# Altium PCB arduino_motor.PcbDoc
Units mm, origin at the board's own origin, x right, y up, seen from the top; angles counter-clockwise.
Board outline 71.63 x 51.69 mm, 2 copper layers (Top Layer, Bottom Layer); 24 components, 23 nets, 95 pads, 7 vias.
Unrouted connection lines stored in the file: 8.
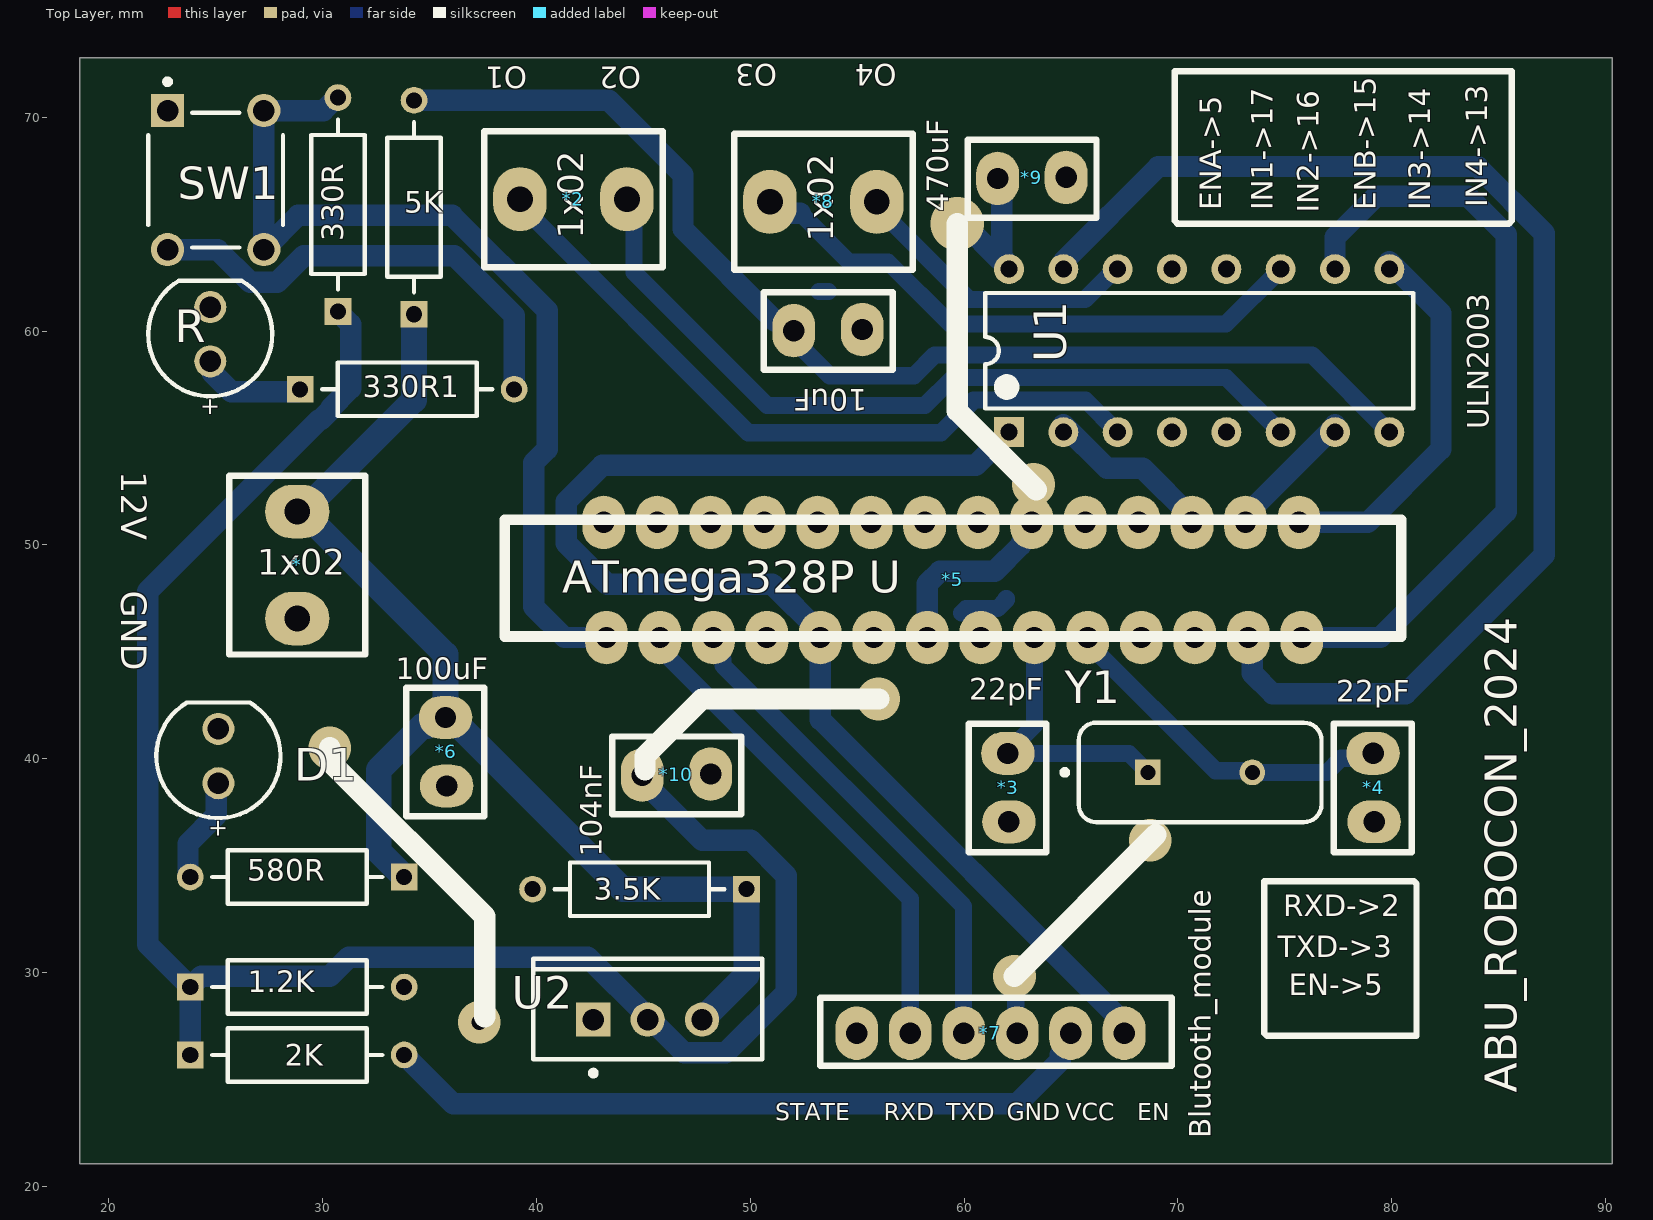
[diagram p0: Top Layer view]
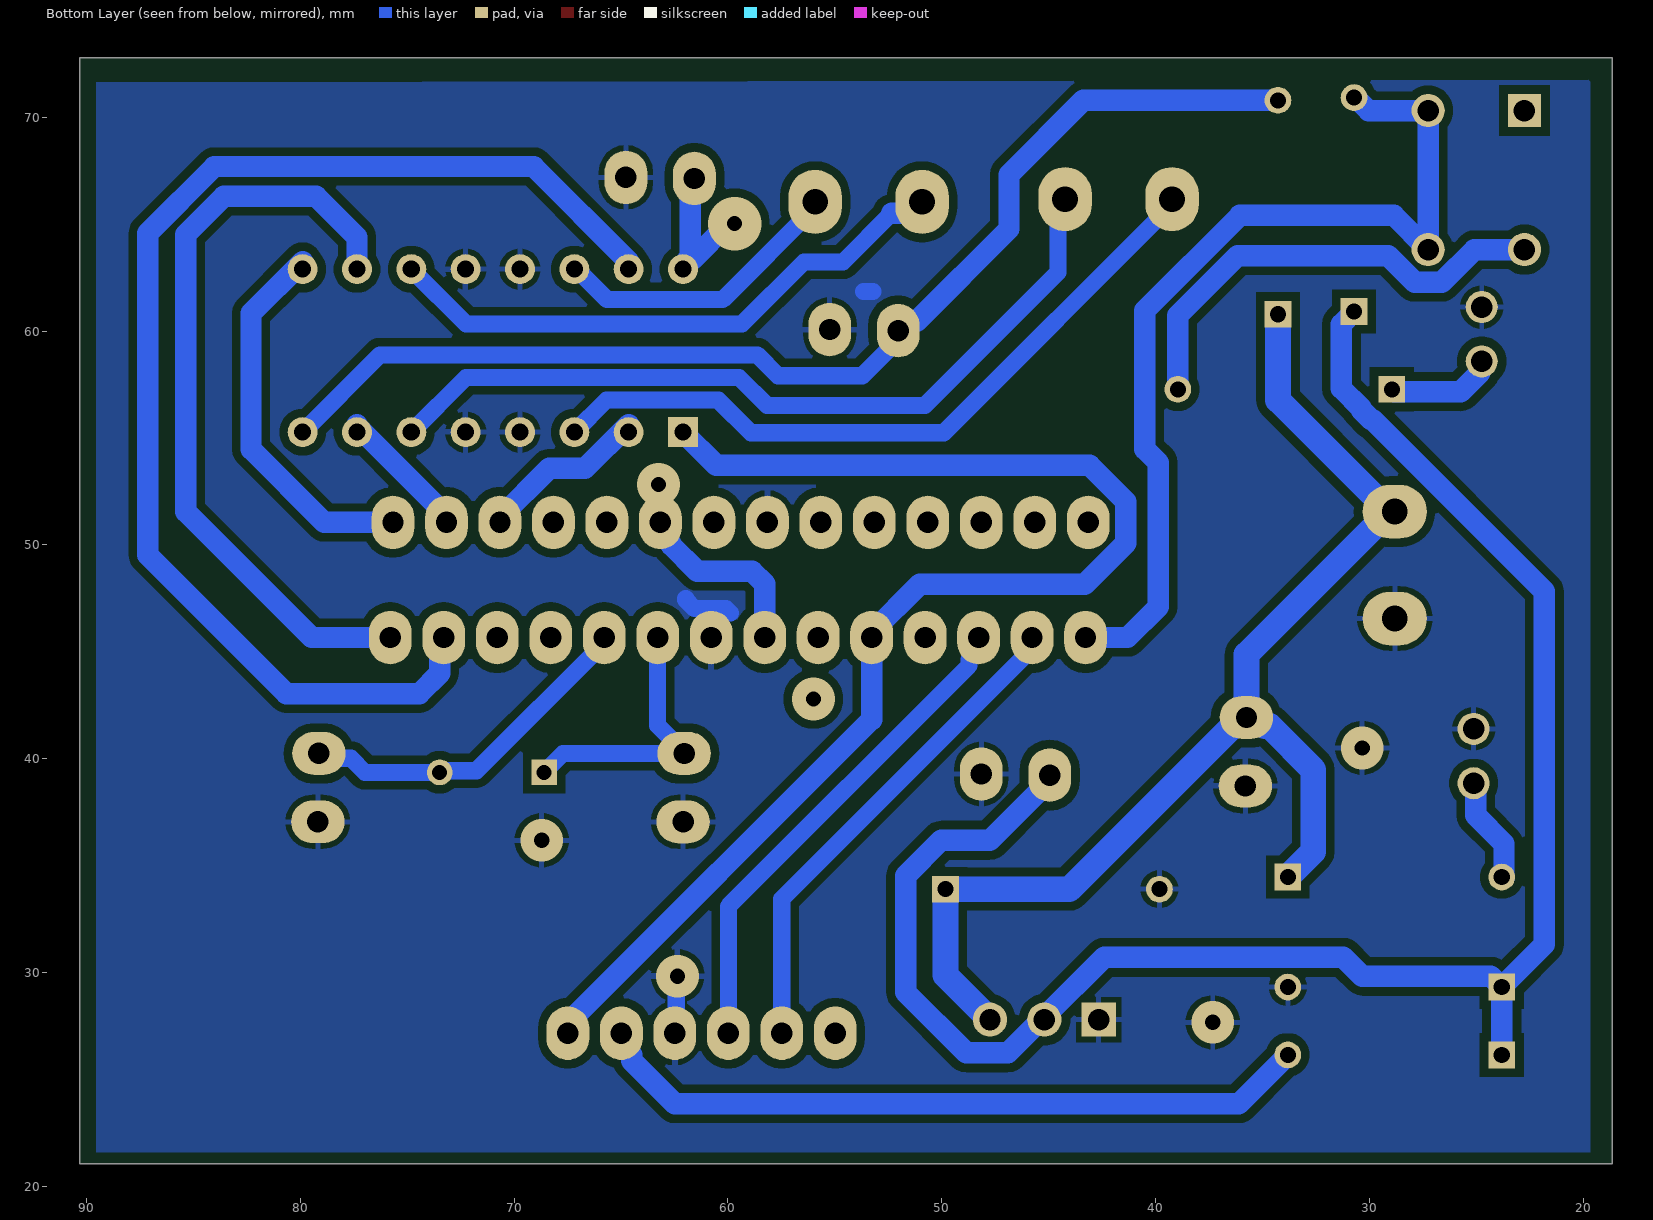
[diagram p1: Bottom Layer view, seen from below]

## Layer stack, top to bottom
Top Solder: solder mask 0.0102, Solder Resist, Dk 3.5
Top Layer: signal copper 0.0356
Dielectric 1: dielectric 0.32, FR-4, Dk 4.8
Bottom Layer: signal copper 0.0356
Bottom Solder: solder mask 0.0102, Solder Resist, Dk 3.5

## Board outline
18.669,21.082 18.669,72.771 90.297,72.771 90.297,21.082

## Design rules (kind name [scope] priority, off if disabled: settings)
Clearance Clearance_4 [All] p1: gap=0.4 ignorepadtopadclearanceinfootprint=FALSE
Clearance Clearance_3 [All] p2: gap=0.4 ignorepadtopadclearanceinfootprint=FALSE
Clearance Clearance_2 [All] p3: gap=0.4 ignorepadtopadclearanceinfootprint=FALSE
Clearance Clearance_1 [All] p4: gap=0.4 ignorepadtopadclearanceinfootprint=FALSE
Clearance [All] p5: gap=0.4 ignorepadtopadclearanceinfootprint=FALSE
PolygonConnect [All] p1: connectstyle=Relief reliefconductorwidth=0.254 reliefentries=4 polygonreliefangle="90 Angle" airgapwidth=0.254
RoutingVias [All] p1: holewidth=0.711 width=1.27 viastyle="Through Hole" minholewidth=0.711 minwidth=1.27 maxholewidth=0.711 maxwidth=1.27
SolderMaskExpansion [All] p1: expansion=0.102 istentingtop=FALSE
Width Width_4 [All] p1: maxlimit=1.2 minlimit=0.254 preferedwidth=0.8
Width Width_3 [All] p2: maxlimit=1.2 minlimit=0.254 preferedwidth=0.8 toplayer_maxwidth=0.254 toplayer_prefwidth=0.254 minimp=50.000000 maximp=50.000000 favimp=50.000000
Width Width_2 [All] p3: maxlimit=1.2 minlimit=0.254 preferedwidth=0.254 toplayer_maxwidth=0.254 minimp=50.000000 maximp=50.000000 favimp=50.000000
Width [All] p4: maxlimit=0.254 minlimit=0.254 preferedwidth=0.254
Width Width_1 [(InNet('GND') AND OnLayer('Bottom 3D Body'))] p5: maxlimit=1.2 minlimit=0.254 preferedwidth=0.254 toplayer_maxwidth=0.254 minimp=50.000000 maximp=50.000000 favimp=50.000000
30 further rules are at their usual default settings.

## Components (designator, comment, footprint, x,y, rotation, side; value= is the part's Value field where it differs from the comment)
1.2K "MRS25000C1001FCT00" FP-MRS25-MFG 28.829,29.337 r0 top
2K "MRS25000C1001FCT00" FP-MRS25-MFG 28.829,26.162 r0 top
3.5K "MRS25000C1001FCT00" FP-MRS25-MFG 44.831,33.909 r180 top
5K "MRS25000C1001FCT00" FP-MRS25-MFG 34.29,65.786 r90 top
10uF "capacitor" PCBComponent_1#1 50.521,58.369 r90 top (schematic designator *1)
330R "MRS25000C1001FCT00" FP-MRS25-MFG 30.734,65.913 r90 top
330R1 "MRS25000C1001FCT00" FP-MRS25-MFG 33.969,57.277 r0 top
580R "MRS25000C1001FCT00" FP-MRS25-MFG 28.829,34.478 r180 top (schematic designator R1)
* "Component_1" PCBComponent_1#2 28.448,50.546 r0 top
*2 "Component_1" PCBComponent_1#2 40.259,65.786 r90 top
*3 "capacitor" PCBComponent_1#1 60.397,41.779 r0 top
*4 "capacitor" PCBComponent_1#1 77.47,41.783 r0 top
*5 "Component_1" PCBComponent_1#3 43.986,47.502 r90 top
*6 "capacitor" PCBComponent_1#1 34.112,43.459 r0 top
*7 "Component_1" PCBComponent_1#4 58.286,28.956 r90 top
*8 "Component_1" PCBComponent_1#2 51.943,65.659 r90 top
*9 "capacitor" PCBComponent_1#1 60.046,65.481 r90 top
*10 "capacitor" PCBComponent_1#1 43.434,37.592 r90 top
D1 "151053GS03000" WL-TMRW_D5.8H11.7 25.146,40.132 r90 top
R "151053GS03000" WL-TMRW_D5.8H11.7 24.765,59.852 r90 top
SW1 "EVQ-PAG07K" FP-EVQ-PAG07K-MFG 25.019,67.056 r0 top
U1 "L293D" STM-L293D-16 70.993,59.084 r90 top
U2 "LM317T" NDE0003A 45.212,27.813 r0 top
Y1 "FOXSLF/160-20" FOX-FOXSLF160-20 71.035,39.37 r0 top

## Footprints (in the part's own frame and the unit in brackets; to place one, negate y for a bottom-side part, rotate by r counter-clockwise, add the part's x,y. Pads: shape width x height; smd on the part's side, far side on the other; paste and mask are expansions set on the pad)
FOX-FOXSLF160-20 [mm] "THD, 2-Leads, Body 11.35x4.65mm"
  rect 1.2x1.2 hole 0.7: 1(-2.44,0)
  round 1.2 hole 0.7: 2(2.44,0)
  silkscreen extent -6.45,-2.32 5.68,2.32, body extent -5.67,-2.32 5.68,2.33, height 3.6
FP-EVQ-PAG07K-MFG [mm]
  rect 1.55x1.55 hole 1 paste-2539.97 mask+0: A(-2.25,3.25)
  round 1.55 hole 1 paste-2539.97 mask+0: A'(-2.25,-3.25) B(2.25,3.25) B'(2.25,-3.25)
  silkscreen extent -3.15,-3.15 3.15,4.72, body extent -3.25,-4.13 3.25,4.13, height 0.25
FP-MRS25-MFG [mm]
  rect 1.25x1.25 hole 0.75 paste-2539.97 mask+0: 1(-5,0)
  round 1.25 hole 0.75 paste-2539.97 mask+0: 2(5,0)
  silkscreen extent -3.98,-1.25 3.98,1.25, body extent -5.72,-1.35 5.72,1.35, height 0.25
NDE0003A [mm] "FM, 3-Leads, Body 10.7x4.7mm, Pitch 2.54mm"
  rect 1.6x1.6 hole 1: 1(-2.54,0)
  round 1.6 hole 1: 2(0,0) 3(2.54,0)
  silkscreen extent -5.35,-2.62 5.35,2.85, body extent -5.4,-1.9 5.4,2.9, height 19.4
PCBComponent_1#1 [mm]
  oval 2.5x2 hole 1: 1(1.651,-1.524) 2(1.702,-4.724)
  silkscreen extent -0.18,-6.15 3.45,-0.13
PCBComponent_1#2 [mm]
  oval 3x2.5 hole 1.2: 1(0.381,1.016) 2(0.381,-3.984)
  silkscreen extent -2.8,-5.66 3.56,2.69
PCBComponent_1#3 [mm]
  oval 2.5x2 hole 1: 1(-1.829,0.7) 2(-1.829,-1.8) 3(-1.829,-4.3) 4(-1.829,-6.8) 5(-1.829,-9.3) 6(-1.829,-11.8) 6(3.552,-4.173) 7(-1.829,-14.3) 8(-1.829,-16.8) 8(3.552,0.827) 9(-1.829,-19.3) 10(-1.829,-21.8) 11(-1.829,-24.3) 12(-1.829,-26.8) 13(-1.829,-29.3) 14(-1.829,-31.8) 15(3.552,-31.673) 16(3.552,-29.173) 17(3.552,-26.673) 18(3.552,-24.173) 19(3.552,-21.673) 20(3.552,-19.173) 21(3.552,-16.673) 22(3.552,-14.173) 23(3.552,-11.673) 24(3.552,-9.173) 25(3.552,-6.673) 27(3.552,-1.673)
  silkscreen extent -1.78,-36.45 3.68,5.46
PCBComponent_1#4 [mm]
  oval 2.5x2 hole 1: 1(-1.778,3.302) 2(-1.778,0.802) 3(-1.778,-1.698) 4(-1.778,-4.198) 5(-1.778,-6.698) 6(-1.778,-9.198)
  silkscreen extent -3.3,-11.43 -0.13,5
STM-L293D-16 [mm] "DIP, 16-Leads, Body 20x6.85mm, Pitch 2.54mm"
  rect 1.4x1.4 hole 0.8: 1(-3.81,8.89)
  round 1.4 hole 0.8: 2(-3.81,6.35) 3(-3.81,3.81) 4(-3.81,1.27) 5(-3.81,-1.27) 6(-3.81,-3.81) 7(-3.81,-6.35) 8(-3.81,-8.89) 9(3.81,-8.89) 10(3.81,-6.35) 11(3.81,-3.81) 12(3.81,-1.27) 13(3.81,1.27) 14(3.81,3.81) 15(3.81,6.35) 16(3.81,8.89)
  silkscreen extent -3.93,-10 2.7,10.26, body extent -3.93,-10 3.93,10, height 5.1
WL-TMRW_D5.8H11.7 [mm] "THT Mono-color Round LED, 2-leads"
  round 1.5 hole 1: 1(1.27,0) 2(-1.27,0)
  silkscreen extent -2.9,-2.9 2.5,2.9, body extent -2.9,-2.9 2.5,2.9, height 11.7

## Part data
1.2K 2K 3.5K 5K 330R 330R1 580R: library part CMP-02408-000051-1, "RES 1K OHM 0.6W 1% AXIAL", Case/Package=Axial, Max Operating Temperature=155°C, Max Power Dissipation=600mW, Min Operating Temperature=-55°C, Package Quantity=5000, Resistance=1kR, Resistance Tolerance=1%, Resistor Type="Metal Film", Temperature Coefficient=50ppm/°C, Voltage Rating=350V, Construction=Cylindrical, Contact Plating=Tin, Diameter=2.5mm, Lead Diameter=0.6mm, Lead Free="Lead Free", Length=6.5mm, Military Standard=Not, Mount="Through Hole", Number of Pins=2, Number of Terminations=2, Packaging="Tape and Reel", Power Rating=600mW, Radiation Hardening=No, RoHS Compliant=Yes, Series=MRS25, Technology="THIN FILM", Termination=Axial, Tolerance=1%, Voltage Rating (DC)=350V, Weight=0.00776oz, Width=2.5mm
D1 R: library part CMP-1489-00005-2, Case/Package=Radial, Color=Green, Forward Current=100mA, Forward Voltage=3.4V, Max Operating Temperature=85°C, Max Reverse Voltage (DC)=5V, Min Operating Temperature=-40°C, Test Current=20mA, Dominant Wavelength=522nm, Height=8.6mm, Length=5mm, Lens Size=5mm, Lens Style="Circular, Clear, Round", Luminous Intensity=10cd, Mount="Through Hole", NexarPartId=29717817, Packaging=Bulk, Peak Wavelength=515nm, REACH SVHC=Unknown, RoHS=Compliant, Viewing Angle=30°, Wavelength=522nm, Width=5mm
SW1: library part CMP-05618-000034-1, "SWITCH TACTILE SPST-NO 0.02A 15V", Actuator Color=Black, Contact Current Rating=20mA, Contact Resistance=50mR, Max Operating Temperature=70°C, Max Voltage Rating (DC)=15V, Min Operating Temperature=-20°C, Operating Force=2.6N, Package Quantity=500, Actuator Length=3.1mm, Actuator Type=Standard, Current Rating=20mA, Depth=7.8mm, Electrical Life=50000Cycles, Illumination Type=Non-Illuminated, Lead Free="Lead Free", Length=6mm, Max Current Rating=20mA, Mechanical Life=50000Cycles, Mount="Through Hole", Orientation=Straight, Packaging=Bulk, Radiation Hardening=No, RoHS Compliant=Yes, Series=EVQPA, Size=6mm, Switch Function=Off-Mom, Switch Travel=0.25mm, Termination="PC Pin", Throw Configuration=SPST, Voltage Rating (DC)=15V
U1: library part CMP-2000-06524-1, "Push-Pull Four Channel Driver with Diode, 4.5 to 36 V, -40 to 150 degC, 16-Pin PDIP, RoHS, Tube", Current - Output / Channel=600mA, Current - Peak Output=1.2A, Manufacturer=STMicroelectronics, On-State Resistance=-, Operating Temperature=-40°C~150°C, Package / Case="16-DIP(0.300\",7.62mm)", Package Description="16-Pin Thru-Hole Dual-In-Line, Body 20 x 6.85 mm, Pitch 2.54 mm", Package Reference=DIP-16, Standard Package=25, Supplier Device Package=16-PowerDIP, Voltage - Supply=4.5V~36V, Category=IntegratedCircuits(ICs), Datasheet URL=http://www.st.com/st-web-ui/static/active/en/resource/technical/document/datasheet/CD00000059.pdf, Datasheet Version=07/2003, Dynamic Catalog=HalfBridge, Family=PMIC-MOSFET,BridgeDrivers-InternalSwitch, Input Type=Non-Inverting, Manufacturer URL=http://www.st.com/, Mounting Technology=ThroughHole, Mounting Type=ThroughHole, Number of Outputs=4, Other Names=497-2936-5, Other Related Documents=L293DViewAllSpecifications, Packaging=Tube, PartNumber=L293D, Series=-, Type=HalfBridge
U2: library part CMP-0062-02456-3, "3-Terminal Adjustable Regulator, 3-pin TO-220", Manufacturer="Texas Instruments", PackageTopMarking="NSUZXYTTE#*LM317T P+", PowerWise=N, ComponentLink1Description="Datasheet URL", ComponentLink1URL=http://www.ti.com/general/docs/lit/getliterature.tsp?genericPartNumber=LM317-N&fileType=pdf, CompType="LDO IC", PackageDescription="TO-220, Molded, 3 Lead, Straight", PackageReference=NDE0003A, PinCount=3, RoHS=N
Y1: library part CMP-1749-00003-1, "Resistance Weld Thru-Hole Crystal, 16 MHz, -20 to 70 degC, 2-Pin THD, RoHS, Bulk", Case\Package=Axial, Max Operating Temperature="155 degC", Min Operating Temperature="-55 degC", Package Quantity=200, Power Rating="250 mW", Resistance="221 kohm", Tolerance=1%, Voltage Rating="250 V", ComponentLink1Description="Manufacturer URL", ComponentLink1URL=http://www.foxonline.com/, ComponentLink2Description=Datasheet, ComponentLink2URL=http://www.foxonline.com/pdfs/hc49slf.pdf, DatasheetVersion=Mar-15, Length="0.248 inch", Mount="Through Hole", PackageDescription="2-Pin Through Hole Device, Body 11.35 x 4.65 mm", PackageReference=FOXSLF160-20, Packaging=Bulk, RoHSCompliant=true

## Via types
v1: diameter 2, hole 0.711, Top Layer to Bottom Layer, 6 vias
v2: diameter 2.5, hole 0.711, Top Layer to Bottom Layer, 1 vias

## Nets (pads, with @x,y where several pads share a name; then routed paths per layer and width w, separated by ;. In a path a pad name is that pad's centre, name@x,y a point inside that pad or via, vN(x,y) a via of type N, cw(c..) or ccw(c..) an arc to the next point about the centre after c; other vN are vias at no path point)
GND: 1.2K.2 3.5K.2 10uF.2 *3.2 *4.2 *5.8 *5.22 *6.2 *7.4 *9.2 *10.2 *.2 D1.1 R.1 U1.4 U1.5 U1.12 U1.13 U2.1 | length 5.8
  Bottom Layer w0.8: 53.213,61.849 53.662,61.849 ; 10uF.2 10uF.2@55.245,60.266 ; 59.892,46.817 60.098,47.023 61.562,47.023 61.976,47.438 61.976,47.498 ; v1(62.357,29.845) 62.42,29.781 62.42,27.241 *7.4
  other v1: 37.338,27.686 68.707,36.195 30.353,40.513
Net1.2K_1: 1.2K.1 2K.1 330R.1 *5.7 *5.20 *9.1 *10.1 U1.16 U2.2 | length 103.4
  Bottom Layer w1: 2K.1 1.2K.1 ; 330R.1 31.323,60.324 31.323,57.315 30.394,56.386 30.394,56.321 29.926,55.852 29.861,55.852 21.844,47.835 21.844,31.322 1.2K.1 ; *10.1 44.958,38.993 47.756,36.195 50.038,36.195 51.689,34.544 51.689,29.083 48.865,26.259 46.911,26.259 45.357,27.813 U2.2 45.212,27.939 42.417,30.734 31.236,30.734 30.347,29.845 24.337,29.845 1.2K.1 ; *5.7 58.286,48.182 58.872,48.768 61.432,48.768 62.659,49.995 62.659,50.033 63.159,50.533 *5.20 63.202,51.098 63.202,52.788 v1(63.246,52.832) ; v2(59.69,65.024) 59.973,65.024 U1.16@61.648,63.348 ; *9.1 61.761,66.941 61.761,63.461 61.903,63.319 61.903,63.202 62.103,63.002 U1.16
  other v1: 56.007,42.799
Net2K_2: 2K.2 *7.5 | length 33.9
  Bottom Layer w1: 2K.2 36.115,23.876 62.484,23.876 64.492,25.884 64.492,26.166 64.984,26.657 *7.5
Net3.5K_1: 3.5K.1 5K.1 580R.1 *6.1 *.1 U2.3 | length 58
  Bottom Layer w1.2: *.1 *.1@29.079,51.562 ; 580R.1 32.639,35.668 32.639,39.497 34.677,41.535 34.897,41.535 35.297,41.935 *6.1 ; 5K.1 34.29,56.773 *.1@29.079,51.562 ; U2.3 49.831,29.892 3.5K.1 44.04,33.909 36.013,41.935 *6.1 ; *.1@29.079,51.562 35.763,44.878 *6.1
Net5K_2: 5K.2 10uF.1 U1.8 | length 54.6
  Bottom Layer w0.8: 10uF.1 52.045,59.588 53.721,57.912 57.658,57.912 58.634,58.888 76.269,58.888 U1.8
  Bottom Layer w1: 5K.2 43.387,70.786 46.863,67.31 46.863,64.77 51.171,60.462 51.603,60.462 10uF.1
Net330R1_1: 330R1.1 R.2 | length 5.1
  Bottom Layer w1: R.2 24.861,58.486 24.861,58.046 25.741,57.166 28.858,57.166 330R1.1
Net330R1_2: 330R1.2 SW1.A SW1.A' | length 22
  Bottom Layer w1: SW1.A' 25.107,63.806 26.636,62.277 27.902,62.277 29.141,63.516 36.179,63.516 38.969,60.726 330R1.2
Net330R_2: 330R.2 *5.1 SW1.B SW1.B' | length 44.1
  Bottom Layer w1: 330R.2 30.666,70.913 30.059,70.306 SW1.B SW1.B' 28.868,65.405 36.068,65.405 40.513,60.96 40.513,54.483 39.878,53.848 39.878,47.117 41.322,45.673 *5.1
Net*2_1: *2.1 U1.3 | length 33.9
  Bottom Layer w0.8: *2.1@39.243,65.917 49.915,55.245 58.928,55.245 60.452,56.769 64.154,56.769 64.165,56.78 65.677,56.78 U1.3
  Bottom Layer w1: *2.1@39.243,65.917 *2.1
Net*2_2: *2.2 U1.6 | length 38
  Bottom Layer w0.8: *2.2@44.53,65.88 44.568,65.842 44.568,62.747 50.8,56.515 58.166,56.515 59.485,57.834 72.243,57.834 U1.6
  Bottom Layer w1: *2.2 *2.2@44.53,65.88
Net*3_1: *3.1 *5.9 Y1.1 | length 12.9
  Bottom Layer w0.8: *5.9@63.252,45.639 *5.9 63.286,41.567 62.048,40.329 *3.1 67.71,40.255 Y1.1
Net*4_1: *4.1 *5.10 Y1.2 | length 16.5
  Bottom Layer w0.8: *5.10 65.786,45.423 71.762,39.447 73.398,39.447 Y1.2 76.962,39.37 77.621,40.029 78.891,40.029 *4.1
Net*5_2: *5.2 *7.2 | length 23.3
  Bottom Layer w0.8: *5.2 45.786,45.146 57.484,33.448 *7.2
Net*5_3: *5.3 *7.3 | length 23.3
  Bottom Layer w0.8: *5.3 48.286,45.098 48.733,44.652 48.733,44.358 59.984,33.107 *7.3
Net*5_5: *5.5 *7.6 U1.1 | length 62.2
  Bottom Layer w1: U1.1 60.55,53.721 43.095,53.721 41.405,52.031 41.405,50.077 43.324,48.159 51.031,48.159 53.286,45.904 *5.5 53.286,41.837 67.484,27.639 *7.6
Net*5_13: *5.13 U1.15 | length 59.1
  Bottom Layer w1: U1.15@64.643,63.246 69.088,67.691 84.007,67.691 87.122,64.576 87.122,49.53 80.645,43.053 74.422,43.053 73.477,43.998 73.477,45.482 *5.13
Net*5_14: *5.14 U1.10 | length 36
  Bottom Layer w1: *5.14 79.455,45.673 85.344,51.562 85.344,64.516 83.566,66.294 79.248,66.294 77.343,64.389 U1.10
Net*5_15: *5.15 U1.9 | length 17.8
  Bottom Layer w1: *5.15 78.867,51.054 82.296,54.483 82.296,60.833 U1.9@79.883,63.246
Net*5_16: *5.16 U1.7 | length 6.3
  Bottom Layer w1: *5.16 73.159,51.373 77.343,55.557 U1.7@77.343,55.626
Net*5_17: *5.17 U1.2 | length 8
  Bottom Layer w1: U1.2@64.643,55.626 66.684,53.585 68.358,53.585 70.659,51.285 *5.17
Net*8_1: *8.1 U1.11 | length 27.3
  Bottom Layer w0.8: 52.353,65.503 54.627,63.229 56.45,63.229 59.354,60.325 72.234,60.325 U1.11
  Bottom Layer w1: *8.1 51.464,65.503 52.353,65.503
Net*8_2: *8.2 U1.14 | length 13.9
  Bottom Layer w0.8: *8.2@55.927,65.79 60.249,61.468 65.649,61.468 U1.14@67.075,62.894
  Bottom Layer w1: *8.2@55.927,65.79 *8.2 ; U1.14@67.075,62.894 U1.14
NetD1_2: 580R.2 D1.2 | length 5
  Bottom Layer w1: 580R.2@23.702,34.478 23.723,34.499 23.723,36.034 25.05,37.361 25.05,38.766 D1.2
pads on no net: *5.4 *5.6 *5.11 *5.12 *5.18 *5.19 *5.21 *5.23 *5.24 *5.25 *5.27 *7.1
copper on no net: | length 0.5
  Bottom Layer w1: 70.786,45.152 70.786,45.673

## Polygon pours and split planes (outlines as drawn)
GND on Bottom Layer "NONET_L-01_P-001" (solid, remove dead copper, pour order 0): 19.689,71.751 89.535,71.627 89.535,21.604 19.689,21.604

## Silkscreen, mask and mechanical layers (free items; w line width, h text height)
Top Overlay:
  lines w0.3: 69.85,65.151 69.977,65.024 85.471,65.024 85.598,65.151 85.598,72.136 69.85,72.136 69.85,65.151 ; 74.041,27.178 74.168,27.051 81.153,27.051 81.153,34.163 81.026,34.29 74.041,34.29 74.041,27.178
  lines w1: 30.353,40.513 30.353,39.878 37.592,32.639 37.592,27.94 ; 45.085,39.497 45.085,40.132 47.752,42.799 56.007,42.799 ; 59.69,65.024 59.69,56.388 59.69,56.261 63.373,52.578 ; 62.357,29.845 68.961,36.449
  text "O3" at 51.262,72.471 h1 r180
  text "O4" at 56.85,72.471 h1 r180
  text "O1" at 39.578,72.344 h1 r180
  text "O2" at 44.912,72.344 h1 r180
  text "IN4->13" at 84.459,65.782 h1 r90
  text "ENA->5" at 72.013,65.655 h1 r90
  text "IN1->17" at 74.426,65.655 h1 r90
  text "ENB->15" at 79.252,65.655 h1 r90
  text "IN3->14" at 81.792,65.655 h1 r90
  text "IN2->16" at 76.585,65.528 h1 r90
  text "ULN2003" at 84.536,55.418 h1 r90
  text "12V" at 20.593,53.448 h1.2 r270
  text "GND" at 20.593,47.86 h1.2 r270
  text "RXD->2" at 74.926,32.635 h1
  text "TXD->3" at 74.672,30.73 h1
  text "EN->5" at 75.18,28.952 h1
  text "ABU_ROBOCON_2024" at 85.837,24.403 h1.5 r90
  text "STATE" at 51.177,23.11 h0.8
  text "RXD" at 56.257,23.11 h0.8
  text "TXD" at 59.178,23.11 h0.8
  text "GND" at 62.008,23.106 h0.8
  text "VCC" at 64.766,23.11 h0.8
  text "EN" at 68.104,23.106 h0.8
Drill Drawing:
  lines w0.3: 18.669,21.082 18.669,38.202 18.669,55.679 18.669,72.771 90.297,72.771 90.297,45.099 90.297,21.082 18.669,21.082

## Text inside footprints (layer, text, board x,y; h text height)
*: Top Overlay "1x02" at 26.97,48.611 h1.2
*2: Top Overlay "1x02" at 42.194,64.308 h1.2 r90
*3: Top Overlay "22pF" at 60.24,42.767 h1
*4: Top Overlay "22pF" at 77.389,42.67 h1
*5: Top Overlay "ATmega328P U" at 41.217,47.767 h1.5
*6: Top Overlay "100uF" at 33.447,43.734 h1
*7: Top Overlay "Blutooth_module" at 71.542,22.271 h1 r90
*8: Top Overlay "1x02" at 53.878,64.181 h1.2 r90
*9: Top Overlay "470uF" at 59.263,65.578 h1 r90
*10: Top Overlay "104nF" at 43.058,35.428 h1 r90
D1: Top Overlay "+" at 25.496,36.282 h0.8 r90
R: Top Overlay "+" at 25.115,56.002 h0.8 r90